# Altium PCB New heated bed -F version.PCBDOC
Units mm, origin at the board's own origin, x right, y up, seen from the top; angles counter-clockwise.
Board outline 54.99 x 37.31 mm, 2 copper layers (Top Layer, Bottom Layer); 12 components, 13 nets, 34 pads, 99 vias.
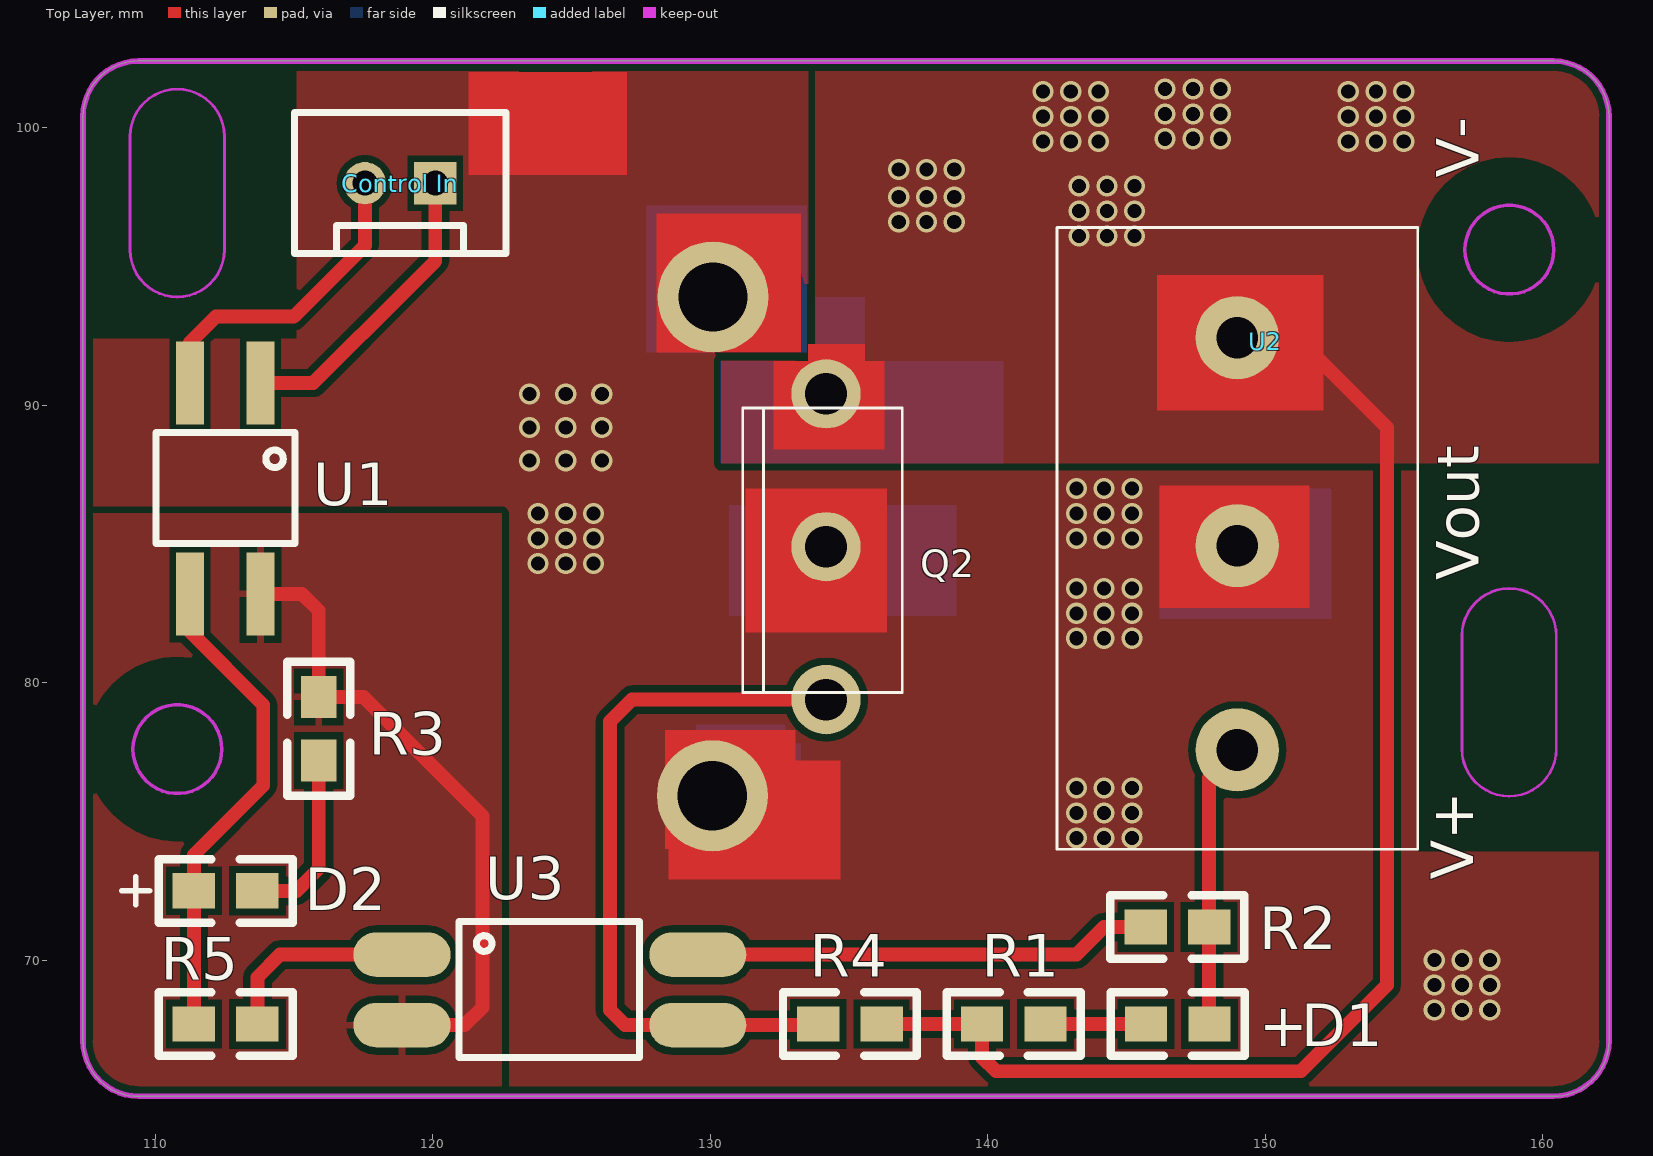
[diagram p0: Top Layer view]
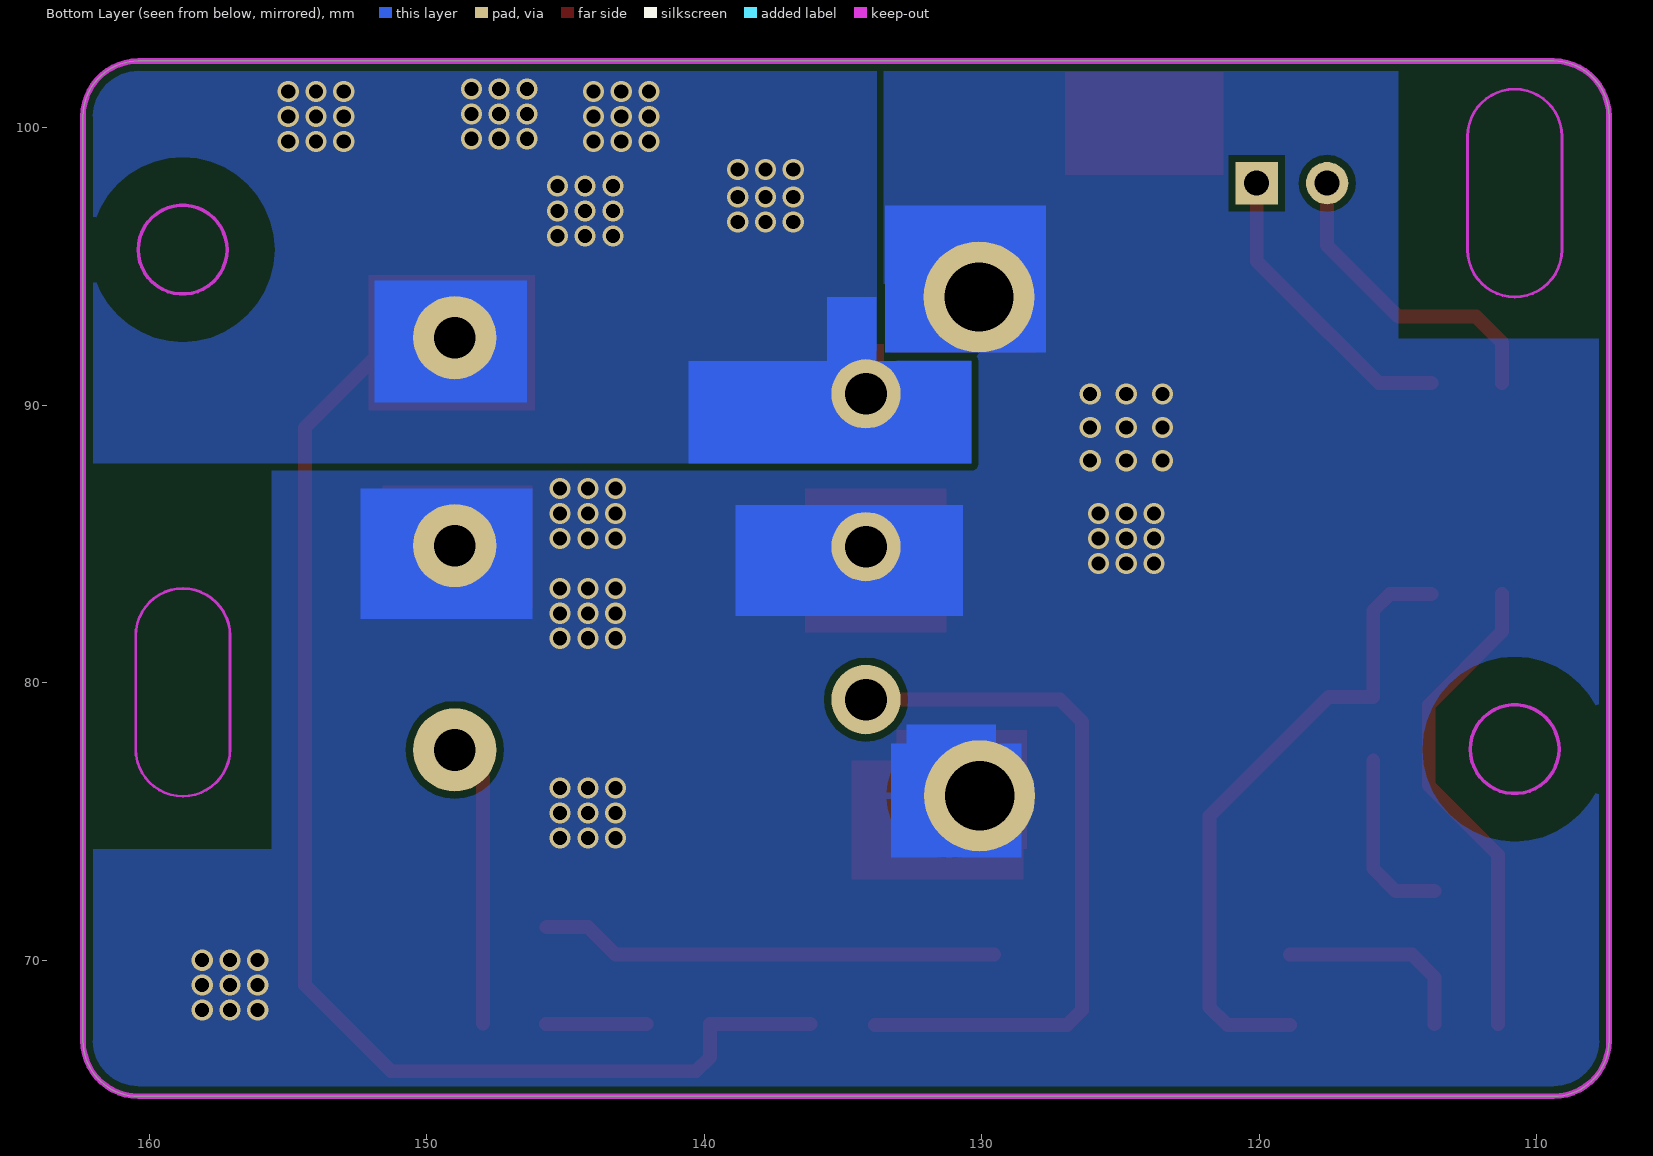
[diagram p1: Bottom Layer view, seen from below]

## Layer stack, top to bottom
Top Layer: signal copper 0.0356
Dielectric: dielectric 0.32, FR-4, Dk 4.8
Bottom Layer: signal copper 0.0356

## Board outline
107.404,67.096 ccw(c109.404,67.096) 109.404,65.096 160.396,65.096 ccw(c160.396,67.096) 162.396,67.096 162.396,100.404 ccw(c160.396,100.404) 160.396,102.404 109.404,102.404 ccw(c109.404,100.404) 107.404,100.404

## Design rules (kind name [scope] priority, off if disabled: settings)
Clearance [All] p1: gap=0.254
ComponentClearance [All] p1: gap=0.254 collisioncheckmode=3 verticalgap=0.254
PolygonConnect PolygonConnect_1 [IsVia] p1: connectstyle=Direct reliefconductorwidth=0.254 reliefentries=4 polygonreliefangle="90 Angle"
PolygonConnect [All] p2: connectstyle=Relief reliefconductorwidth=0.254 reliefentries=4 polygonreliefangle="90 Angle"
RoutingLayers [All] p1: top layer_v5=FALSE bottom layer_v5=FALSE
RoutingVias [All] p1: holewidth=0.711 width=1.27 viastyle="Through Hole" minholewidth=0.711 minwidth=1.27 maxholewidth=0.711 maxwidth=1.27
SolderMaskExpansion [All] p1: expansion=0.102
TestPointUsage [All] p1: valid=0 allowmultiple=FALSE
Testpoint [All] p1: side=3 testpointundercomponent=TRUE minsize=1.016 maxsize=2.54 preferedsize=1.524 minholesize=0 maxholesize=1.016 preferedholesize=0.813 testpointgrid=0.025 style=297 order=0123456789
Width [All] p1: maxlimit=2 minlimit=0.254 preferedwidth=0.254 toplayer_prefwidth=0.5 bottomlayer_prefwidth=0.5 minimp=50.000000 maximp=50.000000 favimp=50.000000
17 further rules are at their usual default settings.

## Components (designator, comment, footprint, x,y, rotation, side; value= is the part's Value field where it differs from the comment)
"Control In" "Comment" CON2 120.1,98 r180 top
D1 "" 0805 148,67.7 r180 top
D2 "" 0805 111.4,72.5 r0 top
Q2 "MESFET-P" IRF3205 134.18,81.9 r180 top
R1 "100K" 0805 139.8,67.7 r0 top
R2 "10K" 0805 145.7,71.2 r0 top
R3 "100K" 0805 115.9,77.2 r90 top
R4 "10K" 0805 133.9,67.7 r0 top
R5 "10K" 0805 111.4,67.7 r0 top
U1 "MP6S" MP6S 113.8,90.8 r270 top
U2 "Header 3" 电源柱子 150,92.3 r0 top locked
U3 "PC817" PC817 118.9,70.2 r0 top

## Footprints (in the part's own frame and the unit in brackets; to place one, negate y for a bottom-side part, rotate by r counter-clockwise, add the part's x,y. Pads: shape width x height; smd on the part's side, far side on the other; paste and mask are expansions set on the pad)
0805 [mil]
  rect 60x50 smd: 1(0,0) 2(90,0)
  silkscreen extent -50,-45 140,45
CON2 [mil]
  rect 60x60 hole 35.43: 1(0,0)
  round 60 hole 35.43: 2(100,0)
  silkscreen extent -100,-100 200,100
IRF3205 [mm]
  round 2.5 hole 1.5 mask+0.051: 2(0,-3)
  silkscreen extent -2.75,-8 3,2.25
MP6S [mm]
  rect 3x1 smd: 1(0,0) 2(0,-2.54) 3(7.6,-2.54) 4(7.6,0)
  silkscreen extent 1.78,-3.76 5.78,1.24
PC817 [mm]
  oval 3.5x1.6 smd: 1(0,0) 2(0,-2.54) 3(10.66,-2.54) 4(10.66,0)
  silkscreen extent 2.06,-3.7 8.56,1.2
电源柱子 [mm]
  silkscreen extent -7.5,-18.3 5.5,4.1

## Free pads (board coordinates)
  round 4 hole 2.5: 0(130.083,75.926) 1(130.109,93.9)
  round 3 hole 1.5: 0(149,92.435) 1(149,84.94) 2(149,77.576)
  round 2.5 hole 1.5: 1(134.18,90.409) 1(134.18,90.409) 3(134.18,79.391) 3(134.18,79.391)

## Via types
v1: diameter 0.762, hole 0.508, Top Layer to Bottom Layer, 99 vias

## Nets (pads, with @x,y where several pads share a name; then routed paths per layer and width w, separated by ;. In a path a pad name is that pad's centre, name@x,y a point inside that pad or via, vN(x,y) a via of type N, cw(c..) or ccw(c..) an arc to the next point about the centre after c; other vN are vias at no path point)
N1: pad.3 R4.1 U3.3 | length 26.2
  Top Layer w0.5: R4.1@133.86,67.66 U3.3 126.94,67.66 126.4,68.2 126.4,70.5 126.4,78.6 127.191,79.391 pad.3@134.18,79.391
N2: "Control In.1" U1.1 | length 10.9
  Top Layer w0.5: U1.1 115.7,90.8 119.2,94.3 120.1,95.2 120.1,98
N3: D1.2 R1.2 | length 3.6
  Top Layer w0.5: R1.2 D1.2
N4: "Control In.2" U1.2 | length 11.4
  Top Layer w0.5: U1.2 111.26,92.26 112.2,93.2 115,93.2 116.66,94.86 117.56,95.76 117.56,98
N5: D2.1 R5.1 U1.3 | length 17.6
  Top Layer w0.5: U1.3 111.26,81.84 113.9,79.2 113.9,76.3 111.4,73.8 D2.1 R5.1
N6: R3.2 U1.4 U3.2 | length 23.2
  Top Layer w0.5: U1.4 115.3,83.2 115.9,82.6 R3.2 117.514,79.486 121.8,75.2 121.8,68.3 121.16,67.66 U3.2
N7: D2.2 R3.1 | length 6.4
  Top Layer w0.5: D2.2 115.1,72.5 115.9,73.3 R3.1
N8: R5.2 U3.1 | length 7.2
  Top Layer w0.5: R5.2 113.686,69.386 114.5,70.2 U3.1
N9: R2.1 U3.4 | length 16.6
  Top Layer w0.5: U3.4 143.2,70.2 144.2,71.2 R2.1
N10: 
V+: D1.1 pad.2 R2.2 | length 10.3
  Top Layer w0.5: D1.1@147.986,67.714 R2.2 147.986,76.562 pad.2
V-: pad.0@149,92.435 pad.1@134.18,90.409 R1.1 R4.2 | length 47.7
  Top Layer w0.5: R4.2 R1.1 139.8,66.5 140.3,66 151.3,66 154.4,69.1 154.4,89.2 151.465,92.135 149.3,92.135 pad.0@149,92.435
  other v1: 143.3,96.1 144.3,96.1 145.3,96.1 136.8,96.6 137.8,96.6 138.8,96.6 143.3,97 144.3,97 145.3,97 136.8,97.5 137.8,97.5 138.8,97.5 143.3,97.9 144.3,97.9 145.3,97.9 136.8,98.5 137.8,98.5 138.8,98.5 142,99.5 143,99.5 144,99.5 153,99.5 154,99.5 155,99.5 146.4,99.6 147.4,99.6 148.4,99.6 142,100.4 143,100.4 144,100.4 153,100.4 154,100.4 155,100.4 146.4,100.5 147.4,100.5 148.4,100.5 142,101.3 143,101.3 144,101.3 153,101.3 154,101.3 155,101.3 146.4,101.4 147.4,101.4 148.4,101.4
Vout: pad.0@130.083,75.926 pad.1@130.109,93.9 pad.1@149,84.94 Q2.2
  other v1: 156.1,68.2 157.1,68.2 158.1,68.2 156.1,69.1 157.1,69.1 158.1,69.1 156.1,70 157.1,70 158.1,70 143.2,74.4 144.2,74.4 145.2,74.4 143.2,75.3 144.2,75.3 145.2,75.3 143.2,76.2 144.2,76.2 145.2,76.2 143.2,81.6 144.2,81.6 145.2,81.6 143.2,82.5 144.2,82.5 145.2,82.5 143.2,83.4 144.2,83.4 145.2,83.4 123.8,84.3 124.8,84.3 125.8,84.3 123.8,85.2 124.8,85.2 125.8,85.2 143.2,85.2 144.2,85.2 145.2,85.2 123.8,86.1 124.8,86.1 125.8,86.1 143.2,86.1 144.2,86.1 145.2,86.1 143.2,87 144.2,87 145.2,87 123.5,88 124.8,88 126.1,88 123.5,89.2 124.8,89.2 126.1,89.2 123.5,90.4 124.8,90.4 126.1,90.4

## Polygon pours and split planes (outlines as drawn)
N6 on Top Layer "TopLayer-No Net" (solid, remove dead copper, pour order 1000): 107.5,65.1 122.496,65.1 122.5,65.096 122.5,86.1 107.404,86.1
V- on Top Layer "TopLayer-No Net" (solid, remove dead copper, pour order 1001): 162.6,102.5 133.896,102.5 133.8,102.404 133.8,91.6 130.4,91.6 130.4,87.9 162.296,87.9 162.396,87.8
Vout on Top Layer "TopLayer-No Net" (solid, remove dead copper, pour order 1002): 107.404,92.4 115.1,92.4 115.1,102.304 115.2,102.404 134,102.404 134,91.4 137.5,87.9 155.5,87.9 155.5,73.9 162.296,73.9 162.396,73.8 162.396,65.004 162.4,65 108.1,65 107.6,65.5
V- on Bottom Layer "TopLayer-No Net" (solid, remove dead copper, pour order 1003): 133.8,102.404 133.8,91.6 130.38,91.6 130.38,87.9 162.296,87.9 162.396,87.8 162.396,102.304 162.3,102.4
Vout on Bottom Layer "TopLayer-No Net" (solid, remove dead copper, pour order 1004): 107.404,92.4 115,92.4 115,102.304 115.1,102.404 133.9,102.404 133.9,87.8 155.5,87.8 155.6,87.7 155.6,74 162.296,74 162.396,73.9 162.396,65.396 162,65 107.3,65

## Keep-outs
Keep-Out Layer:
  circle w0.127: c110.804,77.604 r1.6
  circle w0.127: c158.804,95.604 r1.6
  lines w0.1: 109.1,95.6 ccw(c110.8,95.6) 112.5,95.6 112.5,99.688 ccw(c110.8,99.688) 109.1,99.688 109.1,95.6 ; 157.096,77.608 ccw(c158.796,77.608) 160.496,77.608 160.496,81.696 ccw(c158.796,81.696) 157.096,81.696 157.096,77.608
  lines w0.2: 107.404,67.096 ccw(c109.404,67.096) 109.404,65.096 160.396,65.096 ccw(c160.396,67.096) 162.396,67.096 162.396,100.404 ccw(c160.396,100.404) 160.396,102.404 109.404,102.404 ccw(c109.404,100.404) 107.404,100.404 107.404,67.096

## Other copper
Top Layer:
  rectangle net Vout: 128.08,91.9 133.28,96.9
  rectangle net Vout: 128.38,74 133.08,78.3
  rectangle net V-: 132.28,88.4 136.28,91.6
  rectangle net V-: 133.539,90.987 135.576,92.208
  rectangle net Vout: 131.28,81.8 136.38,87
  rectangle net Vout: 121.3,98.3 127,102
  rectangle net Vout: 128.5,72.9 134.7,77.2
  rectangle net V-: 146.1,89.8 152.1,94.7
  rectangle net Vout: 146.2,82.7 151.6,87.1
Bottom Layer:
  region net Vout: 133.221,91.9 133.221,94.5 128.88,94.5 128.88,91.9
  rectangle net Vout: 128.58,73.7 133.28,77.8
  rectangle net V-: 130.38,87.9 140.58,91.6
  rectangle net Vout: 130.68,82.4 138.88,86.4
  rectangle net Vout: 128.08,92.012 132.838,96.5
  rectangle net V-: 133.8,89.831 135.576,93.9
  rectangle net Vout: 129.5,77.576 132.716,78.5
  rectangle net Vout: 127.7,91.9 133.5,97.2
  rectangle net V-: 146.4,90.1 151.9,94.5
  rectangle net Vout: 146.2,82.3 152.4,87

## Silkscreen, mask and mechanical layers (free items; w line width, h text height)
Top Overlay:
  lines w0.2: 108.8,72.5 109.8,72.5 ; 109.3,72 109.3,73
  text "V-" at 157.7,98.2 h1.52 r90
  text "Vout" at 157.7,83.7 h1.52 r90
  text "V+" at 157.5,72.9 h1.52 r90
  text "+" at 149.8,66.9 h1.52